# Altium PCB TRUMAN_PCB.PcbDoc (part 4 of 5)
Units mil, origin at the board's own origin, x right, y up, seen from the top; angles counter-clockwise.
Board outline 8050 x 5340 mil, 2 copper layers (Top Layer, Bottom Layer); 272 components, 210 nets, 840 pads, 280 vias.
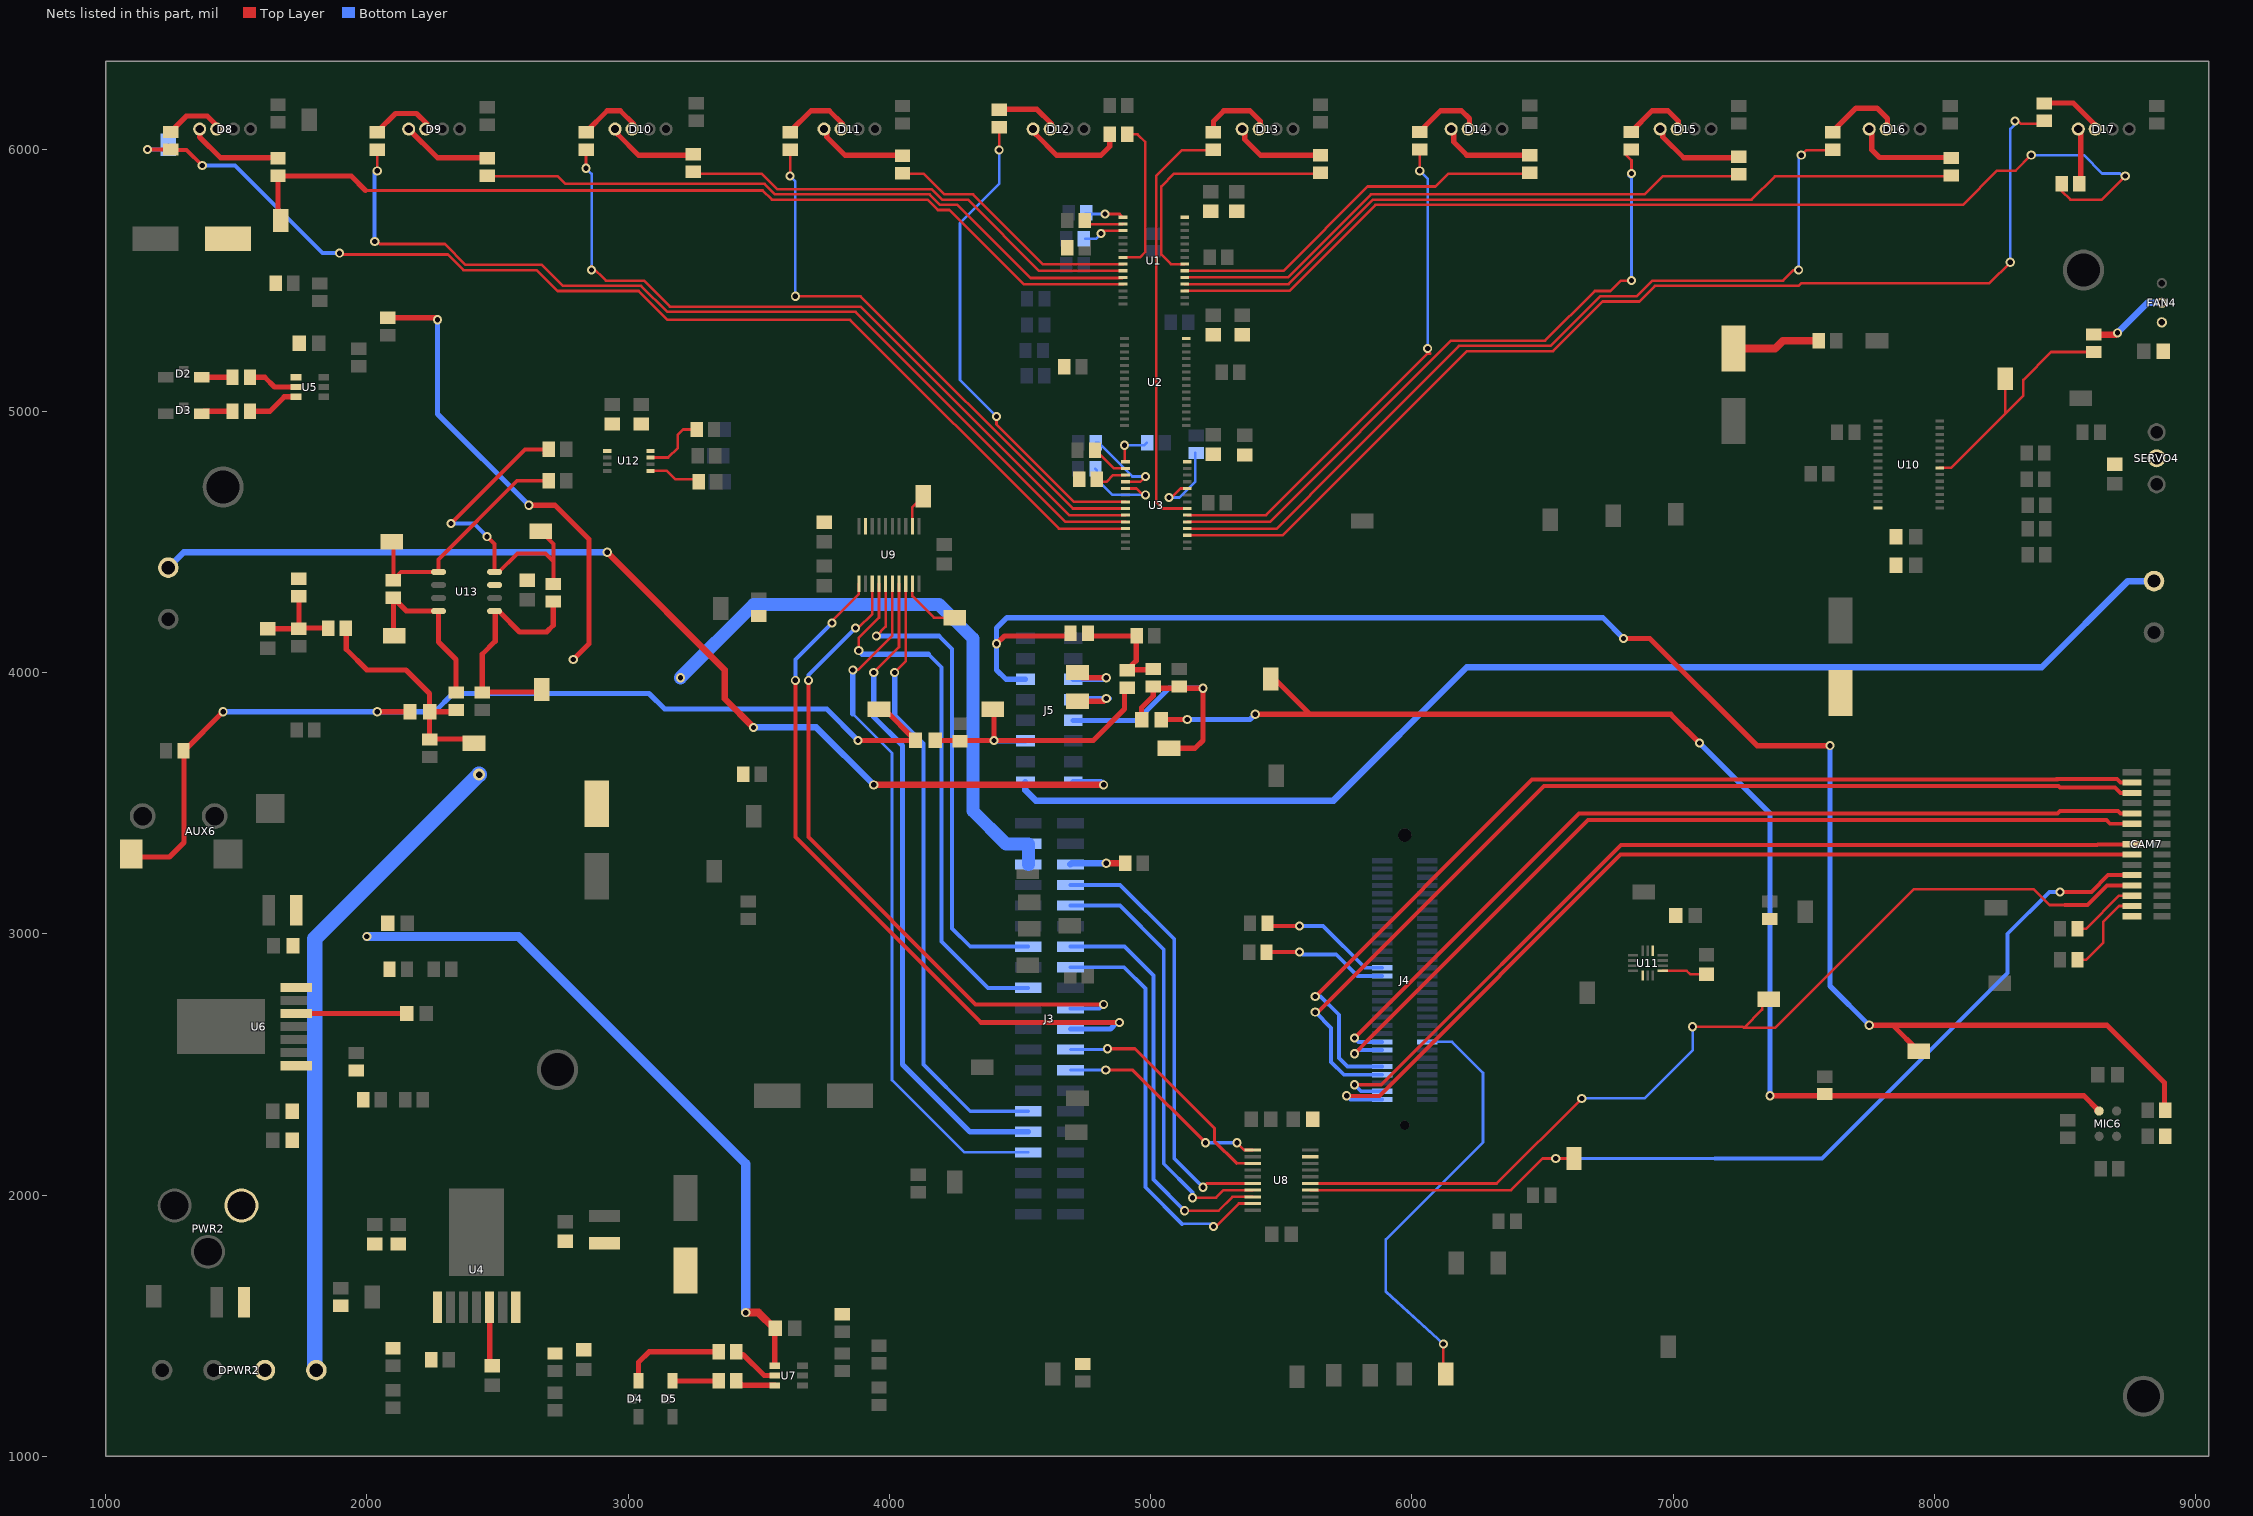
[diagram p2: the nets of this part, all layers, seen from the top]

## Via types
v1: diameter 35, hole 20, Top Layer to Bottom Layer, 278 vias
v2: diameter 40, hole 20, Top Layer to Bottom Layer, 1 vias
v3: diameter 45, hole 25, Top Layer to Bottom Layer, 1 vias

## Nets (pads, with @x,y where several pads share a name; then routed paths per layer and width w, separated by ;. In a path a pad name is that pad's centre, name@x,y a point inside that pad or via, vN(x,y) a via of type N, cw(c..) or ccw(c..) an arc to the next point about the centre after c; other vN are vias at no path point) (continued)
B_LED_1: R100.1 U3.9 | length 2921.5
  Top Layer w10: v1(2838.8,5930) 2838.8,5997.93 R100.1@2840,5999.13 ; v1(2860,5540) 2860,5554.7 2914.7,5500 3060,5500 3160,5400 3890,5400 4687.95,4602.05 U3.9@4903.78,4602.05
  Bottom Layer w10: v1(2838.8,5930) 2860,5908.8 v1(2860,5540)
B_LED_2: R106.1 U3.7 | length 1876.8
  Top Layer w10: v1(4410,4980) 4410,4950 4706.77,4653.23 U3.7@4903.78,4653.23 ; v1(4420,6000) R106.1@4420,6086.54 R106.1@4420,6090
  Bottom Layer w10: v1(4410,4980) 4270,5120 4270,5720 4420,5870 v1(4420,6000)
B_LED_3: R112.1 U3.20 | length 1982.5
  Top Layer w10: U3.20@5140,4602.05 5442.05,4602.05 6060,5220 6070,5220 6060,5230 v1(6060,5240) ; v1(6030,5920) R112.1@6030,6000
  Bottom Layer w10: v1(6030,5920) 6060,5890 v1(6060,5240)
B_LED_4: R116.1 U3.18 | length 3322.7
  Top Layer w10: U3.18@5140,4550.87 5482.49,4550.87 5610,4678.37 5610,4680 6180,5250 6530,5250 6720,5440 6860,5440 6920,5500 7420,5500 7460,5540 v1(7480,5540) ; v1(7490,5980) 7509.13,5999.13 R116.1@7610,5999.13
  Bottom Layer w10: v1(7480,5540) 7480,5970 v1(7490,5980)
B_LED_5: R119.1 U3.17 | length 4247.4
  Top Layer w10: U3.17@5140,4525.28 5505.28,4525.28 6210,5230 6540,5230 6730,5420 6870,5420 6930,5480 7480,5480 7490,5490 8210,5490 v1(8290,5570) ; v1(8307.65,6110.57) 8319.43,6110.57 8330,6100 R119.1@8420,6100
  Bottom Layer w10: v1(8290,5570) 8290,6080 8307.65,6097.65 v1(8307.65,6110.57)
B_LED_6: R95.1 U3.10 | length 3685.9
  Top Layer w10: v1(2030,5650) 2030,5660 2050,5640 2298.28,5640 2378.28,5560 2670,5560 2750,5480 3050,5480 3150,5380 3870,5380 4673.54,4576.46 U3.10@4903.78,4576.46 ; v1(2040,5920) R95.1@2040,5999.13
  Bottom Layer w10: v1@2030,5910 v1(2040,5920)
  Bottom Layer w15: v1(2030,5650) v1@2030,5910
B_LED_7: R101.1 U3.8 | length 2167.7
  Top Layer w10: v1(3620,5900) R101.1@3620,5999.13 ; v1(3640,5440) 3890,5440 4702.36,4627.64 U3.8@4903.78,4627.64
  Bottom Layer w10: v1(3620,5900) 3640,5880 v1(3640,5440)
B_LED_8: R107.1 U3.21 | length 1637.6
  Top Layer w10: U3.21@5140,4627.64 5045.79,4627.64 5020.87,4652.57 5020.87,5900.87 5119.13,5999.13 R107.1@5240,5999.13
B_LED_9: R113.1 U3.19 | length 2607.4
  Top Layer w10: U3.19@5140,4576.46 5456.46,4576.46 6150,5270 6510,5270 6700,5460 6760,5460 6800,5500 v1(6840,5500) ; v1(6840,5910) 6840,5960 6820,5980 R113.1@6840,6000
  Bottom Layer w10: v1(6840,5500) 6840,5890 6830,5900 v1(6840,5910)
B_Line_0: D8.3 R94.2 | length 240.4
  Top Layer w20: R94.2@1250,6070.87 1309.13,6130 1388.91,6130 1421.65,6097.25 1421.65,6078.35 D8.3@1430,6070
B_Line_1: D10.3 R100.2 | length 253.8
  Top Layer w20: R100.2@2840,6070 2920,6150 2970,6150 3020,6100 D10.3@3020,6080
B_Line_2: D12.3 R106.2 | length 253
  Top Layer w20: R106.2@4420,6155.43 4564.57,6155.43 4619.13,6100.87 4619.13,6070.87 D12.3@4620,6070
B_Line_3: D14.3 R112.2 | length 276.4
  Top Layer w20: R112.2@6030,6070.87 6109.13,6150 6190,6150 6220,6120 D14.3@6220,6080 ; D14.3@6219.13,6070.87 D14.3@6220,6070
B_Line_4: D16.3 R116.2 | length 303.8
  Top Layer w20: R116.2@7610,6070 7700,6160 7780,6160 7820,6120 D16.3@7820,6080
B_Line_5: D17.3 R119.2 | length 247.8
  Top Layer w10: D17.3@8620,6080 D17.3@8620,6090.9
  Top Layer w20: R119.2@8420,6180 8530.9,6180 D17.3@8620,6090.9
B_Line_6: D9.3 R95.2 | length 255.6
  Top Layer w20: R95.2@2040,6070 2110,6140 2190,6140 2230,6100 D9.3@2230,6080
B_Line_7: D11.3 R101.2 | length 273.8
  Top Layer w10: D11.3@3820,6080 D11.3@3820,6100
  Top Layer w20: R101.2@3620,6070 3700,6150 3770,6150 D11.3@3820,6100
B_Line_8: D13.3 R107.2 | length 283.1
  Top Layer w20: R107.2@5240,6070 5240,6110 5280,6150 5380,6150 5420,6110 D13.3@5420,6080
B_Line_9: D15.3 R113.2 | length 260.6
  Top Layer w20: R113.2@6840,6070.87 6919.13,6150 6980,6150 7020,6110 D15.3@7020,6080 ; D15.3@7019.13,6070.87 D15.3@7020,6070
BA0: R15.2 U3.1 | length 154.4
  Top Layer w10: v1(4900,4870) 4900,4810.55 U3.1@4903.78,4806.77
  Bottom Layer w10: v1(4900,4870) 4975.43,4870 R15.2@4985.43,4880
BA1: R16.2 U3.2 | length 144.2
  Top Layer w10: R16.2@4788.9,4851.97 4859.69,4781.18 U3.2@4903.78,4781.18
BA2: R17.2 U3.3 | length 124.4
  Top Layer w10: R17.2@4790,4730 4830,4730 4855.59,4755.59 U3.3@4903.78,4755.59
BA3: R18.2 U3.4 | length 328.4
  Top Layer w10: U3.4@4903.78,4730 4960,4730 v1(4980,4750)
  Bottom Layer w10: R18.2@4790,4880 4800,4880 4930,4750 v1(4980,4750)
BA4: R20.2 U3.5 | length 339.3
  Top Layer w10: U3.5@4903.78,4704.41 4945.59,4704.41 4970,4680 v1(4980,4680)
  Bottom Layer w10: R20.2@4788.46,4779.53 4793.46,4774.53 4793.46,4740 4853.46,4680 v1(4980,4680)
BA5: R19.1 U3.24 | length 319.3
  Top Layer w10: v1(5070,4670) 5080,4670 5114.41,4704.41 U3.24@5140,4704.41
  Bottom Layer w10: v1(5070,4670) 5110,4670 5170,4730 R19.1@5170,4840.16
CAM_CLK_N: CAM7.8 J4.4 | length 3472.7
  Top Layer w15: v1(5780,2422.37) 5882.37,2422.37 6800,3340 8539.64,3340 ; 8540,3340 8622.46,3340 8624.98,3342.52 CAM7.8@8755.83,3342.52
  Bottom Layer w15: v1(5780,2422.37) 5804.89,2397.48 J4.4@5885.83,2397.48
CAM_CLK_P: CAM7.9 J4.2 | length 3529.9
  Top Layer w15: v1(5750,2380) 5750.13,2379.87 5875.23,2379.87 6798.51,3303.15 CAM7.9@8755.83,3303.15
  Bottom Layer w15: v1(5750,2380) 5764.02,2365.98 J4.2@5885.83,2365.98
CAM_D0_N: CAM7.2 J4.10 | length 3944.7
  Top Layer w15: v1(5630,2760) 6460,3590 8470,3590 8467.5,3592.5 8698.15,3592.5 8711.91,3578.74 CAM7.2@8755.83,3578.74
  Bottom Layer w15: v1(5630,2760) 5650,2760 5720,2690 5720,2525.23 5753.27,2491.97 J4.10@5885.83,2491.97
CAM_D0_P: CAM7.3 J4.8 | length 3926.1
  Top Layer w15: v1(5630,2700) 5640,2700 6505,3565 8475,3565 8480,3560 8691.28,3560 8711.91,3539.37 CAM7.3@8755.83,3539.37
  Bottom Layer w15: v1(5630,2700) 5690,2640 5690,2509.64 5739.17,2460.47 J4.8@5885.83,2460.47
CAM_D1_N: CAM7.5 J4.16 | length 3451.5
  Top Layer w15: v1(5780,2600.71) 6639.29,3460 8470,3460 8480,3470 8702.54,3470 8711.91,3460.63 CAM7.5@8755.83,3460.63
  Bottom Layer w15: v1(5780,2600.71) 5794.25,2586.46 J4.16@5885.83,2586.46
CAM_D1_P: CAM7.6 J4.14 | length 3463.7
  Top Layer w15: v1(5780,2540.71) 5780.1,2540.71 5822.5,2583.1 5822.5,2583.21 6674.29,3435 8657.52,3435 8671.26,3421.26 CAM7.6@8755.83,3421.26
  Bottom Layer w15: v1(5780,2540.71) 5794.25,2554.96 J4.14@5885.83,2554.96
CAM_ENABLE: CAM7.11 CAMEN.1 U8.14 | length 3802.6
  Top Layer w10: U8.14@5610.47,2018.82 6378.82,2018.82 6500,2140 v1(6550,2140) CAMEN.1@6620,2140
  Top Layer w15: v1(8480,3160) 8600,3160 8664.41,3224.41 CAM7.11@8755.83,3224.41
  Bottom Layer w10: v1(6550,2140) 7160,2140
  Bottom Layer w15: 7160,2140 7570,2140 8280,2850 8280,3000 8440,3160 v1(8480,3160)
CAM_LED_EN: CAM7.12 CAMLEDEN.1 U8.15 | length 3873.6
  Top Layer w10: U8.15@5610.47,2044.41 6324.41,2044.41 v1(6650,2370) ; v1(7073.86,2644.45) 7265.55,2644.45 7270,2640 ; CAMLEDEN.1@7365,2750 7340,2725 7340,2710 7270,2640 ; 8500,3110.08 8439.92,3110.08 8380,3170 7920,3170 7390,2640 7270,2640
  Top Layer w15: 8500,3110.08 8585.43,3110.08 8660.39,3185.04 CAM7.12@8755.83,3185.04
  Bottom Layer w10: v1(6650,2370) 6890,2370 7073.86,2553.86 v1(7073.86,2644.45)
CAMSCLR: CAM7.13 R88.2 | length 267.9
  Top Layer w10: R88.2@8540,3020 R88.2@8546.93,3020 8580.87,3020 8706.54,3145.67 CAM7.13@8755.83,3145.67
CAMSDAR: CAM7.14 R89.2 | length 318.1
  Top Layer w10: R89.2@8570,2900 8580,2900 8645.43,2965.43 8645.43,3045.43 8706.3,3106.3 CAM7.14@8755.83,3106.3
CDC_HPH_REF: HPHREF.1 J5.9 | length 253.3
  Top Layer w20: HPHREF.1@4720,3890 4820,3890 v1(4830,3900)
  Bottom Layer w20: J5.9@4703.74,3895.51 4708.23,3900 v1(4830,3900) v1@4841.02,3900
CDC_HS_DET: HS_DET.1 J5.11 | length 246.9
  Top Layer w20: HS_DET.1@4720,4000 4740,3980 v1(4830,3980)
  Bottom Layer w20: J5.11@4703.74,3974.25 4824.25,3974.25 v1(4830,3980)
CDC_MIC2_P: audioin.1 AUX6.1 C34.1 C44.1 R54.1 | length 3852.5
  Top Layer w20: AUX6.1@1101.1,3294.33 1244.33,3294.33 1300,3350 1300,3700 v1(1450,3850) ; v1(2040,3850) C44.1@2165.2,3850 ; v1(3880,3740) C34.1@4100,3740 3980,3860 audioin.1@3960,3860
  Bottom Layer w20: v1(1450,3850) v1(2040,3850) 2260,3850 2330,3920 3080,3920 3140,3860 3760,3860 v1(3880,3740)
CDC_MIC3_P: C35.1 MIC6.4 micin.1 R57.2 | length 5077.5
  Top Layer w15: MIC6.4@8618.15,2321.85 MIC6.4@8630,2321.85
  Top Layer w20: C35.1@5040,3820 v1(5140,3820) ; v1(5400,3840) 5610,3840 ; micin.1@5460,3975 5475,3975 5610,3840 ; v1(7100,3730) 6990,3840 5610,3840 ; v1(7370,2380) 8571.85,2380 MIC6.4@8630,2321.85
  Bottom Layer w20: v1(5140,3820) 5380,3820 v1(5400,3840) ; v1(7100,3730) 7370,3460 v1(7370,2380)
CDC_MIC_BIAS1: J5.12 MICBIAS.1 R84.2 R121.2 | length 6591.7
  Top Layer w20: v1(4410,4110) 4440,4140 R121.2@4694.57,4140 ; v1(6810,4130) 6910,4130 7320,3720 v1(7600,3720) ; v1(7750,2650) 7840,2650 ; MICBIAS.1@7940,2550 7840,2650 ; R84.2@8880,2325 8880,2430 8660,2650 7840,2650
  Bottom Layer w20: J5.12@4520.67,3974.25 4445.75,3974.25 4410,4010 v1(4410,4110) 4410,4170 4450,4210 6730,4210 v1(6810,4130) ; v1(7600,3720) 7600,2800 v1(7750,2650)
CLK0: CLKGEN0.1 J4.15 | length 1666.4
  Top Layer w10: CLKGEN0.1@6120,1315 v1(6120,1430)
  Bottom Layer w10: J4.15@6059.06,2586.46 6153.54,2586.46 6272,2468 6272,2202 5900,1830 5900,1630 v1(6120,1430)
CLKR: R74.1 U12.7 | length 248.3
  Top Layer w10: U12.7@3085.35,4822.8 3152.8,4822.8 3190,4860 3190,4910 3210,4930 R74.1@3260,4930
CSR: R77.1 U12.5 | length 192.3
  Top Layer w10: U12.5@3085.35,4771.61 3148.39,4771.61 3180,4740 R77.1@3264.57,4740
CSS1: C17.2 U4.5 | length 212.6
  Top Layer w20: C17.2@2470,1357.4 U4.5@2470,1570
CSS2: C24.2 U6.5 | length 422.6
  Top Layer w20: U6.5@1730,2695 C24.2@2152.6,2695
DB_CAM_ENABLE: J3.31 U8.7 | length 1664.2
  Top Layer w10: v1(5160,1990) 5250,1990 5278.82,2018.82 U8.7@5390,2018.82
  Bottom Layer w15: J3.31@4692.91,3108.11 4881.89,3108.11 5050,2940 5050,2120 5160,2010 v1(5160,1990)
DB_GYRO_INT1: J3.27 U8.8 | length 1604.7
  Top Layer w10: v1(5130,1940) 5260,1940 5313.23,1993.23 U8.8@5390,1993.23
  Bottom Layer w15: J3.27@4692.91,2950.63 4899.37,2950.63 5010,2840 5010,2060 v1(5130,1940) v1@5130,1950
DB_GYRO_INT2: J3.25 U8.9 | length 1603.6
  Top Layer w10: v1(5240,1880) 5240,1870 5337.64,1967.64 U8.9@5390,1967.64
  Bottom Layer w10: 5120,1890 5230,1890 v1(5240,1880)
  Bottom Layer w15: J3.25@4692.91,2871.89 4898.11,2871.89 4980,2790 4980,2030 5120,1890
DB_I2C0_SCL: J3.15 U8.1 | length 823.8
  Top Layer w10: v1(5330,2200) 5357.64,2172.36 U8.1@5390,2172.36
  Top Layer w12: v1(4828.19,2478.19) 4931.81,2478.19 v1(5210,2200)
  Bottom Layer w12: J3.15@4692.91,2478.19 v1(4828.19,2478.19) ; v1(5210,2200) v1(5330,2200)
DB_I2C0_SDA: J3.17 U8.3 | length 909.4
  Top Layer w10: 5328.82,2121.18 U8.3@5390,2121.18
  Top Layer w12: v1(4835,2560) 4940,2560 5243.5,2256.5 5243.5,2206.5 5328.82,2121.18
  Bottom Layer w12: J3.17@4692.91,2556.93 4831.93,2556.93 v1(4835,2560)
DB_I2C1_SCL: J3.19 U9.1 | length 2801.5
  Top Layer w10: v1(3780,4190) 3780,4196.73 3883.23,4299.96 U9.1@3883.23,4339.53
  Top Layer w15: v1(3640,3970) 3640,3370 4350,2660
  Top Layer w20: 4350,2660 v1(4880,2660)
  Bottom Layer w15: v1(3640,3970) 3640,4050 v1(3780,4190)
  Bottom Layer w20: J3.19@4692.91,2635.67 4845.67,2635.67 4870,2660 v1(4880,2660)
DB_I2C1_SDA: J3.21 U9.3 | length 2605.3
  Top Layer w10: v1@3880,4170 3934.41,4224.41 U9.3@3934.41,4339.53
  Top Layer w15: v1(3690,3970) 3690,3370 4330,2730 v1(4820,2730) ; v1(3870,4170) v1@3880,4170
  Bottom Layer w15: v1(3690,3970) 3690,3990 v1(3870,4170) ; J3.21@4692.91,2714.41 4804.41,2714.41 v1(4820,2730)
DB_I2C2_SCL: J4.32 R50.1 | length 480.3
  Top Layer w15: R50.1@5443.46,2930 v1(5570,2930)
  Bottom Layer w15: v1(5570,2930) 5580,2920 5710,2920 5791.57,2838.43 J4.32@5885.83,2838.43
DB_I2C2_SDA: J4.34 R51.1 | length 509.3
  Top Layer w15: R51.1@5446.93,3040 5456.93,3030 v1(5570,3030)
  Bottom Layer w15: v1(5570,3030) 5660,3030 5820.08,2869.92 J4.34@5885.83,2869.92
DB_LED_CONTROL: J3.28 U9.5 | length 1915.2
  Top Layer w10: v1(3950,4140) 3985.59,4175.59 U9.5@3985.59,4339.53
  Bottom Layer w15: 4190,4140 4240,4090 4240,3020 4309.37,2950.63 J3.28@4531.5,2950.63
  Bottom Layer w20: v1(3950,4140) 4190,4140
DB_LED_EN: J3.33 U8.6 | length 1674.3
  Top Layer w10: v1(5200,2030) 5214.41,2044.41 U8.6@5390,2044.41
  Bottom Layer w15: J3.33@4692.91,3186.85 4883.15,3186.85 5090,2980 5090,2140 v1(5200,2030)
DB_PWM_CNTRL: J3.24 U9.4 | length 2086.7
  Top Layer w10: v1(3882.43,4083.59) 3882.43,4132.43 3960,4210 U9.4@3960,4339.53
  Bottom Layer w15: 4150,4070 4200,4020 4200,2970 4376.85,2793.15 J3.24@4531.5,2793.15
  Bottom Layer w20: v1(3882.43,4083.59) 3896.03,4070 4150,4070
DB_SPI0_CLK: J3.8 U9.6 | length 2672.1
  Top Layer w10: v1(3860,4010) 3880,4010 4011.18,4141.18 U9.6@4011.18,4339.53
  Bottom Layer w10: 3860,3841.73 4010,3691.73 4010,2440 4286.77,2163.23 J3.8@4531.5,2163.23
  Bottom Layer w20: 3860,3841.73 v1(3860,4010)
DB_SPI0_CSn: J3.12 U9.8 | length 2378.4
  Top Layer w10: v1(4020,4000) 4062.36,4042.36 U9.8@4062.36,4339.53
  Bottom Layer w15: 4020,3839.21 4130,3729.21 4130,2500 4309.29,2320.71 J3.12@4531.5,2320.71
  Bottom Layer w20: 4020,3839.21 v1(4020,4000)
DB_SPI0_MISO: J3.10 U9.7 | length 2513.6
  Top Layer w10: v1(3940,4000) 4036.77,4096.77 U9.7@4036.77,4339.53
  Bottom Layer w20: v1(3940,4000) 3940,3830 4050,3720 4050,2500 4308.03,2241.97 J3.10@4531.5,2241.97
DRBD_SPKR+: J5.1 SPKR6.1 | length 4158.1
  Top Layer w25: v1(2920,4460) 3370,4010 3370,3900 v1(3480,3790) ; v1(3940,3570) v1(4820,3570)
  Bottom Layer w25: SPKR6.1@1240,4401.21 1298.79,4460 v1(2920,4460) ; v1(3480,3790) 3720,3790 v1(3940,3570) ; J5.1@4703.74,3580.55 4809.45,3580.55 v1(4820,3570)
DRBD_SPKR-: J5.2 SPKR7.2 | length 4714.8
  Bottom Layer w25: J5.2@4520.67,3580.55 4520.67,3549.33 4560,3510 5700,3510 6210,4020 8410,4020 8740,4350 SPKR7.2@8840,4350
FAN_FG: FAN4.2 R65.2 | length 308.2
  Top Layer w25: R65.2@8610,5293.46 v1@8693.46,5293.46 ; FAN4.2@8865,5420 FAN4.2@8870,5415
  Bottom Layer w25: v1(8700,5300) 8815,5415 FAN4.2@8870,5415
Fan_PWM: FANPWM.1 R65.1 U10.7 | length 943.8
  Top Layer w10: U10.7@8020,4783.23 8063.23,4783.23 8270,4990 ; FANPWM.1@8270,5125 8270,4990 ; R65.1@8610,5226.54 8446.54,5226.54 8340,5120 8340,5060 8270,4990
G_LED_0: GLED.1 R92.1 U1.11 | length 3578.4
  Top Layer w10: 1995,5845 3515,5845 3550,5810 4145.15,5810 4185.15,5770 4230,5770 4513.54,5486.46 U1.11@4893.78,5486.46
  Top Layer w20: R92.1@1660,5899.13 1660,5740 GLED.1@1670,5730 ; R92.1@1660,5900 1940,5900 1995,5845
G_LED_1: R98.1 U1.9 | length 1807.7
  Top Layer w10: R98.1@3240,5909.13 3510.87,5909.13 3570,5850 4161.72,5850 4201.72,5810 4300,5810 4572.36,5537.64 U1.9@4893.78,5537.64
G_LED_2: R104.1 U1.7 | length 596.7
  Top Layer w10: U1.7@4893.78,5588.82 4958.82,5588.82 4979.13,5609.13 4979.13,6030.87 4950,6060 R104.1@4910,6060
G_LED_3: R110.1 U1.20 | length 1463.9
  Top Layer w10: U1.20@5130,5537.64 5507.64,5537.64 5830,5860 6090,5860 6139.13,5909.13 R110.1@6440,5909.13
G_LED_4: R115.1 U1.18 | length 3106
  Top Layer w10: U1.18@5130,5486.46 5528.09,5486.46 5851.63,5810 7300,5810 7389.13,5899.13 8063.84,5899.13 R115.1@8064.71,5900
G_LED_5: R118.1 U1.17 | length 4169.3
  Top Layer w10: U1.17@5130,5460.87 5530.87,5460.87 5860,5790 8108.37,5790 8239.19,5920.81 8310.81,5920.81 v1(8370,5980) ; R118.1@8486.54,5870 8486.54,5843.46 8520,5810 8640,5810 v1(8730,5900)
  Bottom Layer w10: v1(8370,5980) 8571.8,5980 8641.8,5910 8710,5910 8720,5900 v1(8730,5900)
G_LED_6: R93.1 U1.10 | length 2595.8
  Top Layer w10: R93.1@2460,5899.13 2730.87,5899.13 2760,5870 3521.72,5870 3561.72,5830 4153.43,5830 4193.43,5790 4260,5790 4540,5510 4891.73,5510 U1.10@4893.78,5512.05
G_LED_7: R99.1 U1.8 | length 987.1
  Top Layer w10: R99.1@4050,5909.13 4130.87,5909.13 4210,5830 4320,5830 4586.77,5563.23 U1.8@4893.78,5563.23
G_LED_8: R105.1 U1.21 | length 994.9
  Top Layer w10: U1.21@5130,5563.23 5076.77,5563.23 5040.87,5599.13 5040.87,5860.87 5089.13,5909.13 R105.1@5650,5909.13
G_LED_9: R111.1 U1.19 | length 2250.3
  Top Layer w10: U1.19@5130,5512.05 5525.39,5512.05 5843.34,5830 6890,5830 6959.13,5899.13 7220,5899.13
G_Line_0: D8.4 R92.2 | length 353.9
  Top Layer w20: D8.4@1360,6080 1360,6050 1440,5970 1625.02,5970 R92.2@1650.52,5973.64
G_Line_1: D10.4 R98.2 | length 313.1
  Top Layer w20: D10.4@2960,6080 2960,6060 3040,5980 3220,5980
G_Line_2: D12.4 R104.2 | length 396.8
  Top Layer w20: D12.4@4560,6080 4560,6060 4640,5980 4810,5980 4843.07,6013.07 R104.2@4843.07,6060
G_Line_3: D14.4 R110.2 | length 350.7
  Top Layer w20: D14.4@6160,6080 6160,6030 6210,5980 R110.2@6440,5980
G_Line_4: D16.4 R115.2 | length 396.8
  Top Layer w20: D16.4@7760,6080 7760,6000 7789.14,5970.86 R115.2@8064.71,5970.86
G_Line_5: D17.4 R118.2 | length 180
  Top Layer w20: 8560,5900 D17.4@8560,6080
G_Line_6: D9.4 R93.2 | length 340.6
  Top Layer w20: D9.4@2160,6080 2270,5970 R93.2@2455,5970
G_Line_7: D11.4 R99.2 | length 349
  Top Layer w20: D11.4@3760,6080 3760,6050 3830,5980 R99.2@4050,5980
G_Line_8: D13.4 R105.2 | length 354.9
  Top Layer w20: D13.4@5360,6080 5360,6040 5420,5980 R105.2@5650,5980
G_Line_9: D15.4 R111.2 | length 323.1
  Top Layer w20: D15.4@6960,6080 6960,6050 7040,5970 7220,5970
GA0: R1.2 U1.1 | length 149
  Top Layer w10: v1(4825,5755) 4881.14,5755 U1.1@4893.78,5742.36
  Bottom Layer w10: R1.2@4750,5755 v1(4825,5755)
GA1: R3.2 U1.2 | length 146.6
  Top Layer w10: R3.2@4750,5720 4755,5715 4892.01,5715 U1.2@4893.78,5716.77
GA2: R5.2 U1.3 | length 156.7
  Top Layer w10: v1(4810,5680) 4821.18,5691.18 U1.3@4893.78,5691.18
  Bottom Layer w10: R5.2@4750,5660 4790,5660 v1(4810,5680)